# EAGLE board smalltetris (EAGLE 6.0)

Size 60.96 x 60.96 mm. Coordinates in mm from the lower left corner, seen from the top.
Outline: 0,60.96 0,0 60.96,0
Copper layers (1*16): Top 0.035mm / dielectric 1.5mm / Bottom 0.035mm
Design rules: minimum track width 10mil, minimum drill 24mil, track to track 8mil, track to pad 8mil, pad to pad 8mil, via to via 8mil, smd to smd 8mil, copper to edge 40mil, drill to drill 8mil, minimum pad ring 10mil, minimum via ring 8mil, stop-mask expansion 4mil, vias tented up to drill 0mil, thermal gap 10mil

## Footprints (pad centres in the part's own frame; a part is rotated, then mirrored left to right if it is on the bottom)
LED3MM = drill 0.813 octagon: A -1.27,0; K 1.27,0

## Placement (x,y rotation side)
00  [LED3MM]  2.54,2.54 0 top
0A  [LED3MM]  2.54,73.66 0 top  (outside the outline)
0B  [LED3MM]  2.54,78.74 0 top  (outside the outline)
01  [LED3MM]  7.62,2.54 0 top
1A  [LED3MM]  7.62,73.66 0 top  (outside the outline)
1B  [LED3MM]  7.62,78.74 0 top  (outside the outline)
02  [LED3MM]  12.7,2.54 0 top
2A  [LED3MM]  12.7,73.66 0 top  (outside the outline)
2B  [LED3MM]  12.7,78.74 0 top  (outside the outline)
03  [LED3MM]  17.78,2.54 0 top
3A  [LED3MM]  17.78,73.66 0 top  (outside the outline)
3B  [LED3MM]  17.78,78.74 0 top  (outside the outline)
04  [LED3MM]  22.86,2.54 0 top
4A  [LED3MM]  22.86,73.66 0 top  (outside the outline)
4B  [LED3MM]  22.86,78.74 0 top  (outside the outline)
05  [LED3MM]  27.94,2.54 0 top
5A  [LED3MM]  27.94,73.66 0 top  (outside the outline)
5B  [LED3MM]  27.94,78.74 0 top  (outside the outline)
06  [LED3MM]  33.02,2.54 0 top
6A  [LED3MM]  33.02,73.66 0 top  (outside the outline)
6B  [LED3MM]  33.02,78.74 0 top  (outside the outline)
07  [LED3MM]  38.1,2.54 0 top
7A  [LED3MM]  38.1,73.66 0 top  (outside the outline)
7B  [LED3MM]  38.1,78.74 0 top  (outside the outline)
08  [LED3MM]  2.54,63.5 0 top
09  [LED3MM]  2.54,68.58 0 top  (outside the outline)
10  [LED3MM]  2.54,7.62 0 top
11  [LED3MM]  7.62,7.62 0 top
12  [LED3MM]  12.7,7.62 0 top
13  [LED3MM]  17.78,7.62 0 top
14  [LED3MM]  22.86,7.62 0 top
15  [LED3MM]  27.94,7.62 0 top
16  [LED3MM]  33.02,7.62 0 top
17  [LED3MM]  38.1,7.62 0 top
18  [LED3MM]  7.62,63.5 0 top
19  [LED3MM]  7.62,68.58 0 top  (outside the outline)
20  [LED3MM]  2.54,12.7 0 top
21  [LED3MM]  7.62,12.7 0 top
22  [LED3MM]  12.7,12.7 0 top
23  [LED3MM]  17.78,12.7 0 top
24  [LED3MM]  22.86,12.7 0 top
25  [LED3MM]  27.94,12.7 0 top
26  [LED3MM]  33.02,12.7 0 top
27  [LED3MM]  38.1,12.7 0 top
28  [LED3MM]  12.7,63.5 0 top
29  [LED3MM]  12.7,68.58 0 top  (outside the outline)
30  [LED3MM]  2.54,17.78 0 top
31  [LED3MM]  7.62,17.78 0 top
32  [LED3MM]  12.7,17.78 0 top
33  [LED3MM]  17.78,17.78 0 top
34  [LED3MM]  22.86,17.78 0 top
35  [LED3MM]  27.94,17.78 0 top
36  [LED3MM]  33.02,17.78 0 top
37  [LED3MM]  38.1,17.78 0 top
38  [LED3MM]  17.78,63.5 0 top
39  [LED3MM]  17.78,68.58 0 top  (outside the outline)
40  [LED3MM]  2.54,22.86 0 top
41  [LED3MM]  7.62,22.86 0 top
42  [LED3MM]  12.7,22.86 0 top
43  [LED3MM]  17.78,22.86 0 top
44  [LED3MM]  22.86,22.86 0 top
45  [LED3MM]  27.94,22.86 0 top
46  [LED3MM]  33.02,22.86 0 top
47  [LED3MM]  38.1,22.86 0 top
48  [LED3MM]  22.86,63.5 0 top
49  [LED3MM]  22.86,68.58 0 top  (outside the outline)
50  [LED3MM]  2.54,27.94 0 top
51  [LED3MM]  7.62,27.94 0 top
52  [LED3MM]  12.7,27.94 0 top
53  [LED3MM]  17.78,27.94 0 top
54  [LED3MM]  22.86,27.94 0 top
55  [LED3MM]  27.94,27.94 0 top
56  [LED3MM]  33.02,27.94 0 top
57  [LED3MM]  38.1,27.94 0 top
58  [LED3MM]  27.94,63.5 0 top
59  [LED3MM]  27.94,68.58 0 top  (outside the outline)
60  [LED3MM]  2.54,33.02 0 top
61  [LED3MM]  7.62,33.02 0 top
62  [LED3MM]  12.7,33.02 0 top
63  [LED3MM]  17.78,33.02 0 top
64  [LED3MM]  22.86,33.02 0 top
65  [LED3MM]  27.94,33.02 0 top
66  [LED3MM]  33.02,33.02 0 top
67  [LED3MM]  38.1,33.02 0 top
68  [LED3MM]  33.02,63.5 0 top
69  [LED3MM]  33.02,68.58 0 top  (outside the outline)
70  [LED3MM]  2.54,38.1 0 top
71  [LED3MM]  7.62,38.1 0 top
72  [LED3MM]  12.7,38.1 0 top
73  [LED3MM]  17.78,38.1 0 top
74  [LED3MM]  22.86,38.1 0 top
75  [LED3MM]  27.94,38.1 0 top
76  [LED3MM]  33.02,38.1 0 top
77  [LED3MM]  38.1,38.1 0 top
78  [LED3MM]  38.1,63.5 0 top
79  [LED3MM]  38.1,68.58 0 top  (outside the outline)
80  [LED3MM]  2.54,43.18 0 top
81  [LED3MM]  7.62,43.18 0 top
82  [LED3MM]  12.7,43.18 0 top
83  [LED3MM]  17.78,43.18 0 top
84  [LED3MM]  22.86,43.18 0 top
85  [LED3MM]  27.94,43.18 0 top
86  [LED3MM]  33.02,43.18 0 top
87  [LED3MM]  38.1,43.18 0 top
90  [LED3MM]  2.54,48.26 0 top
91  [LED3MM]  7.62,48.26 0 top
92  [LED3MM]  12.7,48.26 0 top
93  [LED3MM]  17.78,48.26 0 top
94  [LED3MM]  22.86,48.26 0 top
95  [LED3MM]  27.94,48.26 0 top
96  [LED3MM]  33.02,48.26 0 top
97  [LED3MM]  38.1,48.26 0 top
A0  [LED3MM]  2.54,53.34 0 top
A1  [LED3MM]  7.62,53.34 0 top
A2  [LED3MM]  12.7,53.34 0 top
A3  [LED3MM]  17.78,53.34 0 top
A4  [LED3MM]  22.86,53.34 0 top
A5  [LED3MM]  27.94,53.34 0 top
A6  [LED3MM]  33.02,53.34 0 top
A7  [LED3MM]  38.1,53.34 0 top
B0  [LED3MM]  2.54,58.42 0 top
B1  [LED3MM]  7.62,58.42 0 top
B2  [LED3MM]  12.7,58.42 0 top
B3  [LED3MM]  17.78,58.42 0 top
B4  [LED3MM]  22.86,58.42 0 top
B5  [LED3MM]  27.94,58.42 0 top
B6  [LED3MM]  33.02,58.42 0 top
B7  [LED3MM]  38.1,58.42 0 top

## Library data of the parts
00 0A 0B 01 1A 1B 02 2A 2B 03 3A 3B 04 4A 4B 05 5A 5B 06 6A 6B 07 7A 7B 08 09 10-87 90-97 A0 A1-A7 B0 B1-B7 = led

## Nets
D: 00.A 11.A 22.A 33.A 44.A 55.A 66.A 77.A
S0: 00.K 0A.A 0B.A 01.A 02.A 03.A 04.A 05.A 06.A 07.A 08.A 09.A 10.K 20.K 30.K 40.K 50.K 60.K 70.K 80.K 90.K A0.K B0.K
S1: 01.K 1A.A 1B.A 10.A 11.K 12.A 13.A 14.A 15.A 16.A 17.A 18.A 19.A 21.K 31.K 41.K 51.K 61.K 71.K 81.K 91.K A1.K B1.K
S2: 02.K 2A.A 2B.A 12.K 20.A 21.A 22.K 23.A 24.A 25.A 26.A 27.A 28.A 29.A 32.K 42.K 52.K 62.K 72.K 82.K 92.K A2.K B2.K
S3: 03.K 3A.A 3B.A 13.K 23.K 30.A 31.A 32.A 33.K 34.A 35.A 36.A 37.A 38.A 39.A 43.K 53.K 63.K 73.K 83.K 93.K A3.K B3.K
S4: 04.K 4A.A 4B.A 14.K 24.K 34.K 40.A 41.A 42.A 43.A 44.K 45.A 46.A 47.A 48.A 49.A 54.K 64.K 74.K 84.K 94.K A4.K B4.K
S5: 05.K 5A.A 5B.A 15.K 25.K 35.K 45.K 50.A 51.A 52.A 53.A 54.A 55.K 56.A 57.A 58.A 59.A 65.K 75.K 85.K 95.K A5.K B5.K
S6: 06.K 6A.A 6B.A 16.K 26.K 36.K 46.K 56.K 60.A 61.A 62.A 63.A 64.A 65.A 66.K 67.A 68.A 69.A 76.K 86.K 96.K A6.K B6.K
S7: 07.K 7A.A 7B.A 17.K 27.K 37.K 47.K 57.K 67.K 70.A 71.A 72.A 73.A 74.A 75.A 76.A 77.K 78.A 79.A 87.K 97.K A7.K B7.K
S8: 08.K 18.K 28.K 38.K 48.K 58.K 68.K 78.K 80.A 81.A 82.A 83.A 84.A 85.A 86.A 87.A
S9: 09.K 19.K 29.K 39.K 49.K 59.K 69.K 79.K 90.A 91.A 92.A 93.A 94.A 95.A 96.A 97.A
S10: 0A.K 1A.K 2A.K 3A.K 4A.K 5A.K 6A.K 7A.K A0.A A1.A A2.A A3.A A4.A A5.A A6.A A7.A
S11: 0B.K 1B.K 2B.K 3B.K 4B.K 5B.K 6B.K 7B.K B0.A B1.A B2.A B3.A B4.A B5.A B6.A B7.A

## Tracks (layer width: path | path; a pad name or v marks a point on that pad's centre or on a via)
D  (7 unrouted)
S0  (22 unrouted)
S1  (22 unrouted)
S2  (22 unrouted)
S3  (22 unrouted)
S4  (22 unrouted)
S5  (22 unrouted)
S6  (22 unrouted)
S7  (22 unrouted)
S8  (15 unrouted)
S9  (15 unrouted)
S10  (15 unrouted)
S11  (15 unrouted)